# Altium PCB touch-tara-h-6 (final).PcbDoc
Units mm, origin at the board's own origin, x right, y up, seen from the top; angles counter-clockwise.
Board outline 39.75 x 59.82 mm, 2 copper layers (Top Layer, Bottom Layer); 26 components, 28 nets, 73 pads, 0 vias.
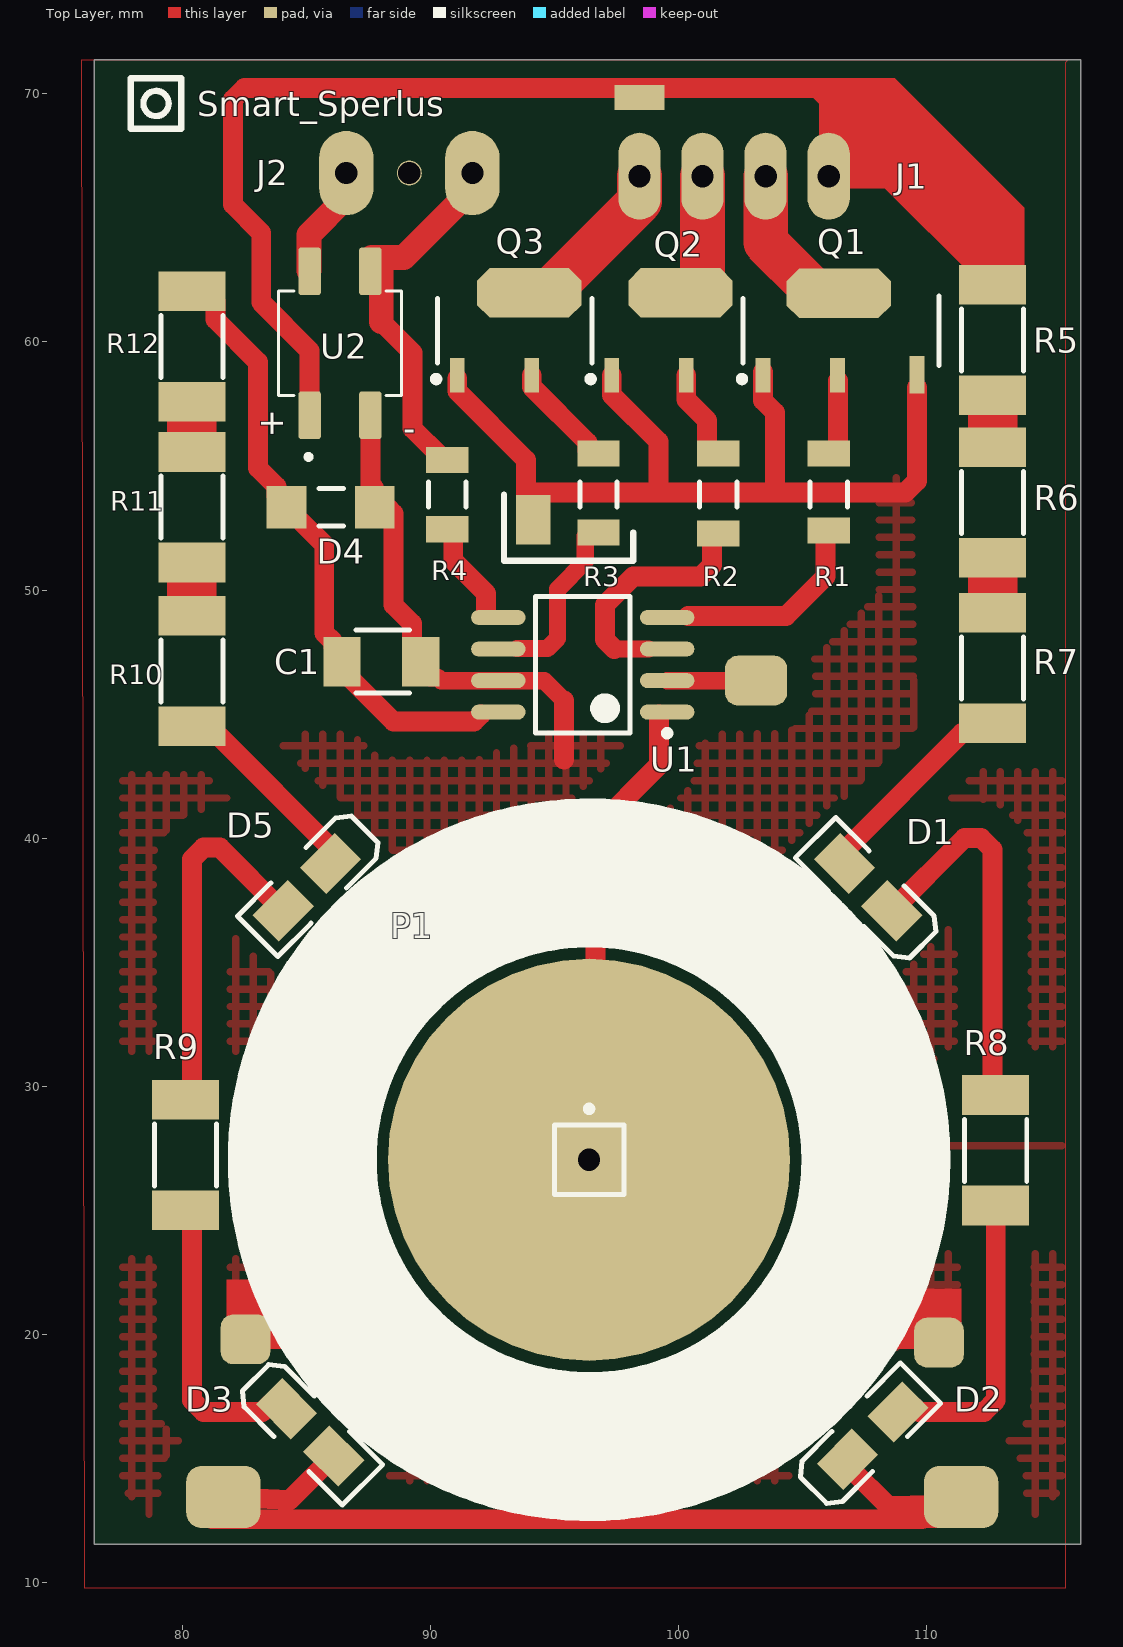
[diagram p0: Top Layer view]
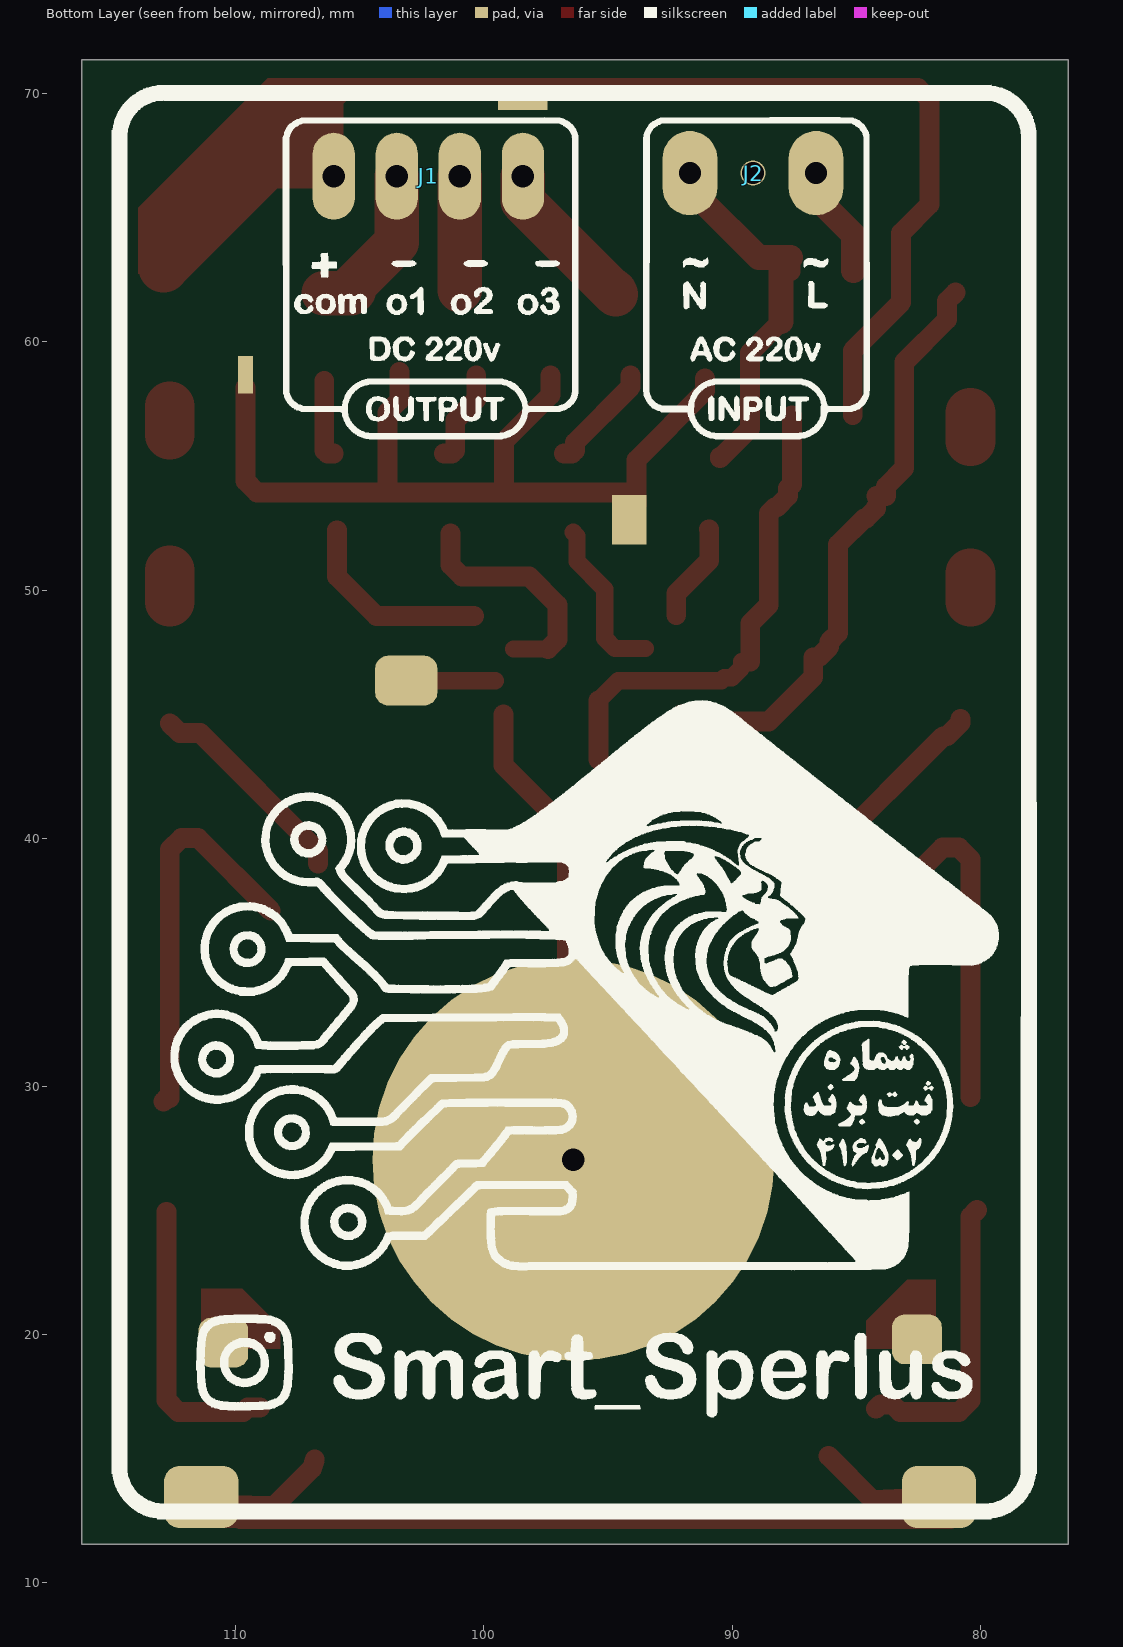
[diagram p1: Bottom Layer view, seen from below]
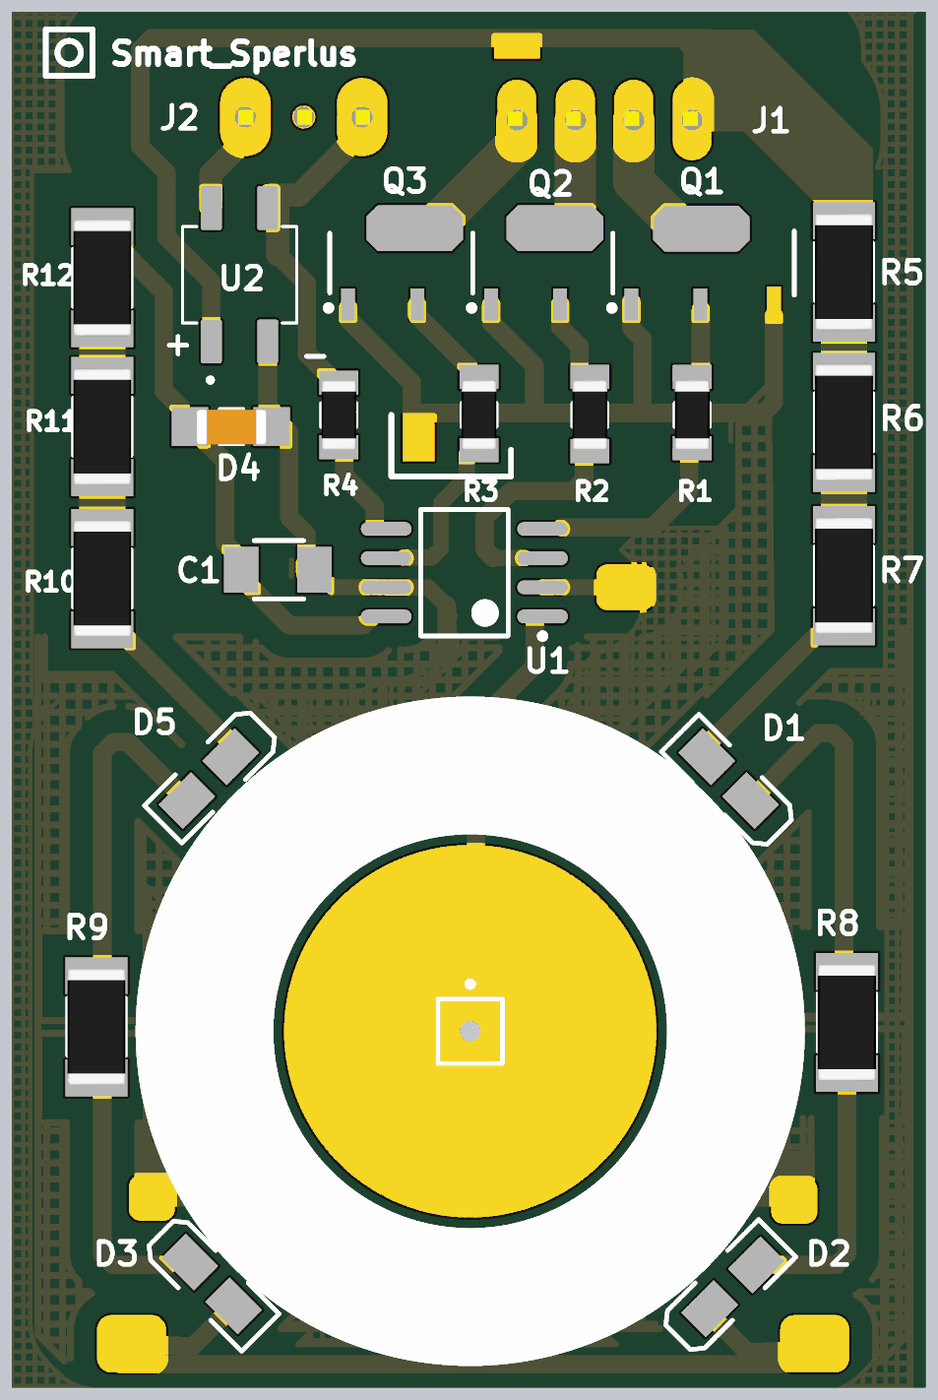
[diagram p2: 3D render of the assembled board from above, using the file's embedded part models]

## Layer stack, top to bottom
Top Solder: solder mask 0.0102, Solder Resist, Dk 3.5
Top Layer: signal copper 0.0356
Dielectric 1: dielectric 0.32, FR-4, Dk 4.8
Bottom Layer: signal copper 0.0356
Bottom Solder: solder mask 0.0102, Solder Resist, Dk 3.5

## Board outline
76.454,11.557 76.454,71.374 116.205,71.374 116.205,11.557

## Design rules (kind name [scope] priority, off if disabled: settings)
Clearance Clearance_1 [InPolygon] p1: gap=1 ignorepadtopadclearanceinfootprint=FALSE
Clearance [All] p2: gap=0.6 ignorepadtopadclearanceinfootprint=FALSE
PolygonConnect [All] p1: connectstyle=Relief reliefconductorwidth=0.254 reliefentries=4 polygonreliefangle="90 Angle" airgapwidth=0.254
RoomDefinition touch-tara-h [InComponentClass('touch-tara-h')] p1: confinementstyle=ConfineIn formatcopy=TRUE lockcomponents=FALSE outline 144.907,-4.953 247.904,-4.953 247.904,23.114 144.907,23.114
RoutingLayers [All] p1: top layer_v5=FALSE bottom layer_v5=TRUE
RoutingVias [All] p1: holewidth=0.711 width=2.5 viastyle="Through Hole" minholewidth=0.711 minwidth=1.27 maxholewidth=0.711 maxwidth=2
SolderMaskExpansion [All] p1: expansion=0.102 istentingtop=FALSE
Width [All] p1: maxlimit=3 minlimit=0.5 preferedwidth=1
29 further rules are at their usual default settings.

## Components (designator, comment, footprint, x,y, rotation, side; value= is the part's Value field where it differs from the comment)
C1 "=Value" "CAP 1206" 85.979,53.34 r0 top
D1 "LED2" 3.2X1.6X1.1#1 107.569,37.973 r315 top
D2 "LED2" 3.2X1.6X1.1#2 107.696,16.002 r225 top
D3 "LED2" 3.2X1.6X1.1#3 85.217,16.002 r135 top
D4 "Diode" C1206 88.265,47.117 r180 top
D5 "LED2" 3.2X1.6X1.1#4 85.09,38.1 r45 top
J1 "Header4X1" "HEADER 4X1" 106.045,66.675 r180 bottom
J2 "Header3X1" "HEADER 3X1" 86.614,66.802 r0 bottom
P1 "Plug" PIN1 96.393,27.051 r0 top
Q1 "Triac" SOT89N#1 104.902,60.452 r90 top
Q2 "Triac" SOT89N#2 98.806,60.452 r90 top
Q3 "Triac" SOT89N#3 92.583,60.452 r90 top
R1 "10K" "RES 1206 (3216X08L)"#1 106.045,53.848 r90 top (schematic designator R2)
R2 "10K" "RES 1206 (3216X08L)"#2 101.6,53.848 r90 top (schematic designator R3)
R3 "10K" "RES 1206 (3216X08L)"#3 96.774,53.848 r90 top (schematic designator R10)
R4 "10K" "RES 1206 (3216X08L)"#4 90.678,53.848 r270 top (schematic designator R13)
R5 "10K" "RES 2010 (5026X08L)" 112.649,60.071 r270 top (schematic designator R4)
R6 "10K" "RES 2010 (5026X08L)" 112.649,53.528 r270 top (schematic designator R5)
R7 "10K" "RES 2010 (5026X08L)" 112.649,46.863 r270 top (schematic designator R6)
R8 "10K" "RES 2010 (5026X08L)" 112.776,27.432 r270 top (schematic designator R12)
R9 "10K" "RES 2010 (5026X08L)" 80.137,27.244 r90 top (schematic designator R11)
R10 "10K" "RES 2010 (5026X08L)" 80.391,46.736 r90 top (schematic designator R7)
R11 "10K" "RES 2010 (5026X08L)" 80.391,53.34 r90 top (schematic designator R8)
R12 "10K" "RES 2010 (5026X08L)" 80.391,59.817 r90 top (schematic designator R9)
U1 "ATtiny15L-1SC" 8S2_N 96.139,46.99 r180 top
U2 "MB6S" SOIC245P670X270-4N 86.36,59.944 r90 top

## Footprints (in the part's own frame and the unit in brackets; to place one, negate y for a bottom-side part, rotate by r counter-clockwise, add the part's x,y. Pads: shape width x height; smd on the part's side, far side on the other; paste and mask are expansions set on the pad)
3.2X1.6X1.1#1 [mm] "SMT LED; 2 Flat Leads"
  rect 2x1.5 smd: 1(-1.347,0.09) 2(1.347,0.09)
  silkscreen extent -2.9,-1.15 3.2,1.15
3.2X1.6X1.1#2 [mm] "SMT LED; 2 Flat Leads"
  rect 2x1.5 smd: 1(-1.437,0.18) 2(1.347,0.09)
  silkscreen extent -2.9,-1.15 3.2,1.15
3.2X1.6X1.1#3 [mm] "SMT LED; 2 Flat Leads"
  rect 2x1.5 smd: 1(-1.257,0) 2(1.437,0)
  silkscreen extent -2.9,-1.15 3.2,1.15
3.2X1.6X1.1#4 [mm] "SMT LED; 2 Flat Leads"
  rect 2x1.5 smd: 1(-1.437,0) 2(1.257,0)
  silkscreen extent -2.9,-1.15 3.2,1.15
8S2_N [mm] "SOP, 8-Leads, Body 5.3x5.3mm, Pitch 1.27mm, IPC Medium Density"
  oval 2.2x0.6 smd: 1(-3.4,1.905) 2(-3.4,0.635) 3(-3.4,-0.635) 4(-3.4,-1.905) 5(3.4,-1.905) 6(3.4,-0.635) 7(3.4,0.635) 8(3.4,1.905)
  silkscreen extent -3.52,-2.75 1.9,2.88, body extent -2.73,-2.75 2.73,2.75, height 2.16
C1206 [mm] "Chip Capacitor, Body 3.2x1.6mm, IPC High Density"
  rect 1.5x2 smd: 1(-1.35,0) 2(1.83,0)
  silkscreen extent -0.89,-1.27 1.27,1.27, body extent -1.7,-0.9 1.7,0.9, height 1.3
"CAP 1206" [mm]
  rect 1.6x1.7 smd: 1(-1.778,0) 2(1.778,0)
  silkscreen extent -0.47,-0.75 0.53,0.75, body extent -1.49,-0.77 1.55,0.75, height 0.75
"HEADER 3X1" [mm]
  oval 2.2x3.4 hole 0.9: 1(0,0) 3(5.08,0)
  round 1 hole 0.9: 2(2.54,0)
  body extent -1.24,-1.27 6.38,1.27, height 8.38
"HEADER 4X1" [mm]
  oval 1.7x3.5 hole 0.9: 1(0,0) 2(2.54,0) 3(5.08,0) 4(7.62,0)
  body extent -1.19,-1.22 8.97,1.32, height 8.38
PIN1 [mm] "Connector; Plug"
  round 16.2 hole 0.9: 1(0,0)
  silkscreen extent -1.4,-1.4 1.4,2.17
"RES 1206 (3216X08L)"#1 [mm] "Chip Resistor, 2-Leads, Body 3.2x1.6mm, IPC High Density _ (0.125 W)"
  rect 1.05x1.7 smd: 1(-1.44,0) 2(1.651,0)
  silkscreen extent -0.5,-0.75 0.5,0.75, body extent -1.52,-0.76 1.53,0.76, height 0.6
"RES 1206 (3216X08L)"#2 [mm] "Chip Resistor, 2-Leads, Body 3.2x1.6mm, IPC High Density _ (0.125 W)"
  rect 1.05x1.7 smd: 1(-1.567,0) 2(1.651,0)
  silkscreen extent -0.5,-0.75 0.5,0.75, body extent -1.52,-0.76 1.53,0.76, height 0.6
"RES 1206 (3216X08L)"#3 [mm] "Chip Resistor, 2-Leads, Body 3.2x1.6mm, IPC High Density _ (0.125 W)"
  rect 1.05x1.7 smd: 1(-1.524,0) 2(1.651,0)
  silkscreen extent -0.5,-0.75 0.5,0.75, body extent -1.52,-0.76 1.53,0.76, height 0.6
"RES 1206 (3216X08L)"#4 [mm] "Chip Resistor, 2-Leads, Body 3.2x1.6mm, IPC High Density _ (0.125 W)"
  rect 1.05x1.7 smd: 1(-1.397,0) 2(1.397,0)
  silkscreen extent -0.5,-0.75 0.5,0.75, body extent -1.52,-0.76 1.53,0.76, height 0.6
"RES 2010 (5026X08L)" [mm] "Chip Resistor, 2-Leads, Body 5.0x2.6mm, IPC High Density _ (0.250 W)"
  rect 1.6x2.7 smd: 1(-2.225,0) 2(2.225,0)
  silkscreen extent -1.25,-1.25 1.25,1.25, body extent -2.54,-1.27 2.54,1.27, height 0.6
SOIC245P670X270-4N [mm]
  rrect23% 1.91x0.91 smd: 1(-2.9,1.225) 2(-2.9,-1.225) 3(2.9,-1.225) 4(2.9,1.225)
  silkscreen extent -4.68,-2.48 2.1,2.48
SOT89N#1 [mm] "SOT89, 3-Leads, Body 4.5x2.4 mm, Pitch 1.5mm, Lead Span 4.1mm, IPC Medium Density"
  rect 1.4x0.6 smd: 1(-1.8,1.5) 3(-1.8,-1.5)
  oct 2x4.2 smd: 2(1.502,-1.548)
  silkscreen extent -2.07,-5.59 1.4,2.47, body extent -1.3,-2.3 1.3,2.3, height 1.6
SOT89N#2 [mm] "SOT89, 3-Leads, Body 4.5x2.4 mm, Pitch 1.5mm, Lead Span 4.1mm, IPC Medium Density"
  rect 1.4x0.6 smd: 1(-1.8,1.5) 3(-1.8,-1.5)
  oct 2x4.2 smd: 2(1.524,-1.27)
  silkscreen extent -2.07,2.22 1.3,2.47, body extent -1.3,-2.3 1.3,2.3, height 1.6
SOT89N#3 [mm] "SOT89, 3-Leads, Body 4.5x2.4 mm, Pitch 1.5mm, Lead Span 4.1mm, IPC Medium Density"
  rect 1.4x0.6 smd: 1(-1.8,1.5) 3(-1.8,-1.5)
  oct 2x4.2 smd: 2(1.524,-1.397)
  silkscreen extent -2.07,2.22 1.3,2.47, body extent -1.3,-2.3 1.3,2.3, height 1.6

## Part data
C1: library part Capacitor, "Capacitor"
D1 D2 D3 D5: "Typical RED, GREEN, YELLOW, AMBER GaAs LED", LatestRevisionDate=17-Jul-2002, LatestRevisionNote="Re-released for DXP Platform.", PackageDescription="SM LED; 2 Flat Leads", PackageReference=3.2X1.6X1.1, PackageVersion=Feb-2002, Published=8-Jun-2000, Publisher="Altium Limited"
D4: "Default Diode", Code_JEDEC=DO-214-AB, LatestRevisionDate=17-Jul-2002, LatestRevisionNote="Re-released for DXP Platform.", PackageDescription="DO-214-AB/SMC; 2 C-Bend Leads; Body 7.9 x 5.9 mm, inc. leads (LxW)", PackageReference=SMC, PackageVersion=Sep-1996, Published=8-Jun-2000, Publisher="Altium Limited"
Q1 Q2 Q3: "Silicon Bidirectional Triode Thyristor", ComponentLink1Description="Manufacturer Link", ComponentLink1URL=http://www.motorola.com/, DatasheetVersion=1999, LatestRevisionDate=17-Jul-2002, LatestRevisionNote="Re-released for DXP Platform.", Note="Pin 2 is electrically connected to Pin 4 (TAB)", PackageDescription="TO, Thru-Hole, Vertical, Heatsink Mounted; 3 In-Line Leads; Pitch 2.28 mm", PackageReference=369-03, Published=29-Sep-2000, Publisher="Altium Limited"
R1 R2 R3 R4 R5 R6 R7 R8 R9 R10 R11 R12: library part Resistor, "Resistor", Power="1/4 W", Tolerance=5%
U1: "8-Bit AVR Microcontroller with 1K Byte of Flash Memory", Supplier Part Number 1=ATTINY15L-1SC-ND, ComponentLink1Description=Datasheet, ComponentLink1URL=http://www.atmel.com/dyn/resources/prod_documents/doc1187.pdf, ComponentLink2Description="Atmel.com Home", ComponentLink2URL=http://www.atmel.com, DatasheetVersion=1187E-AVR-06/02, LatestRevisionDate=16-Oct-2006, LatestRevisionNote="IPC-7351 Footprint Added.", PackageDescription="8-Lead, 0.208\" Body, Plastic Small Outline Package (EIAJ)", PackageReference=8S2, PackageVersion="revF, Apr-2008", Published=17-Sep-2003, Publisher="Altium Limited", Supplier 1=Digi-Key, Supplier 2=Mouser, Supplier Part Number 2=556-ATTINY15L1SC
U2: "Bridge Rectifier Single Phase Standard 600V Surface Mount 4-SOIC", Package="BESOP-4 Surge Components", Digi-Key_Part_Number=MB6SCT-ND, Digi-Key_Purchase_URL=https://www.digikey.com.tr/product-detail/en/on-semiconductor/MB6S/MB6SCT-ND/965654?utm_source=snapeda&utm_medium=aggregator&utm_campaign=symbol, MF="ON Semiconductor", MP=MB6S, SnapEDA_Link=https://www.snapeda.com/parts/MB6S/ON%20Semiconductor/view-part/2774209/?ref=snap
P1: LatestRevisionDate=17-Jul-2002, LatestRevisionNote="Re-released for DXP Platform.", Publisher="Altium Limited"

## Free pads (board coordinates)
  rect 1.4x2 all layers, no hole: 156(94.14,52.832)
  rrect50% 2.5x2 all layers, no hole: 157(103.124,46.355)
  rrect50% 3x2.5 all layers, no hole: 158(81.661,13.462) 159(111.379,13.462)
  rect 2x1 all layers, no hole: 160(98.425,69.85)
  rrect50% 2x2 all layers, no hole: 161(110.49,19.685) 162(82.55,19.812)
  rect 0.6x1.524 all layers, no hole: 163(109.601,58.674)

## Nets (pads, with @x,y where several pads share a name; then routed paths per layer and width w, separated by ;. In a path a pad name is that pad's centre, name@x,y a point inside that pad or via, vN(x,y) a via of type N, cw(c..) or ccw(c..) an arc to the next point about the centre after c; other vN are vias at no path point)
GND: C1.2 D4.1 pad.156 pad.161 pad.162 pad.163 Q1.1 Q2.1 Q3.1 U1.7 U2.2 | length 56.8
  Top Layer w0.7: D4.1 89.615,46.867 90.015,46.467 90.313,46.467 90.425,46.355 U1.7 92.749,46.345 94.588,46.345 95.377,45.556
  Top Layer w0.8: U2.2 87.585,54.259 87.738,54.106 87.738,53.79 88.188,53.34 88.265,53.34 88.519,53.086 88.519,49.403 89.265,48.657 D4.1@89.265,47.117 ; Q3.1@91.083,58.525 91.083,58.015 93.853,55.245 93.853,53.933 ; pad.156@94.234,52.832 94.207,52.875 93.853,53.432 93.853,53.933 ; 95.377,43.18 95.377,45.556 ; Q2.1 97.306,57.865 99.187,55.984 99.187,53.933 ; Q1.1@103.402,58.779 103.402,57.634 103.886,57.15 103.886,53.933 ; pad.163@109.601,58.164 109.601,54.402 109.132,53.933 103.886,53.933 ; 93.853,53.933 99.187,53.933 ; 99.187,53.933 103.886,53.933
NetD1_1: D1.1 R7.2 | length 8.6
  Top Layer w0.8: D1.1 106.673,38.996 106.673,39.49 111.421,44.238 112.249,44.238 R7.2
NetD1_2: D1.2 R8.1 | length 15.7
  Top Layer w0.8: D1.2 111.518,40.017 112.18,40.017 112.649,39.548 R8.1@112.649,29.53 ; R8.1@112.776,29.53 R8.1@112.903,29.403
NetD2_1: D2.1 R8.2 | length 11.6
  Top Layer w0.8: D2.1@109.016,17.068 109.511,17.068 109.688,16.891 112.307,16.891 112.776,17.36 R8.2@112.776,24.953
NetD2_2: D2.2 D3.1 pad.158 pad.159 | length 42.3
  Top Layer w0.8: D3.1 84.335,13.342 pad.158 81.28,12.954 81.28,12.641 81.209,12.57 109.81,12.57 109.865,12.624 110.668,12.624 pad.159 110.504,13.17 108.792,13.096 108.443,13.096 106.927,14.612 D2.2
NetD3_2: D3.2 R9.1 | length 12
  Top Layer w0.8: R9.1 80.391,24.765 80.391,17.36 80.86,16.891 83.225,16.891 83.529,17.195 84.024,17.195 D3.2
NetD5_1: D5.1 R9.2 | length 14.5
  Top Layer w0.8: R9.2@80.391,29.578 80.391,39.154 80.86,39.623 81.522,39.623 D5.1@84.067,37.077
NetD5_2: D5.2 R10.1 | length 8.1
  Top Layer w0.8: R10.1@80.796,44.807 80.796,44.656 81.341,44.111 81.492,44.111 86.049,39.554 86.049,39.059 D5.2
NetJ1_2: J1.2 Q1.2 | length 6.6
  Top Layer w1.8: J1.2 103.505,64.008 105.25,62.263 105.25,62.054 105.35,61.954 Q1.2
NetJ1_3: J1.3 Q2.2 | length 4.6
  Top Layer w1.8: Q2.2@100.965,62.076 J1.3
NetJ1_4: J1.4 Q3.2 | length 6.4
  Top Layer w1.8: Q3.2@94.678,61.912 98.425,65.659 J1.4 ; Q3.2@94.733,62.01 Q3.2@94.799,62.076
NetJ2_1: J2.1 U2.4 | length 4.6
  Top Layer w0.8: U2.4@85.108,62.871 U2.4 ; J2.1@86.614,65.823 J2.1
  Top Layer w1: U2.4@85.108,62.871 85.108,64.317 J2.1@86.614,65.823
NetJ2_3: J2.3 R4.1 U2.3 | length 15.4
  Top Layer w0.8: U2.3@87.64,62.844 U2.3@87.64,63.399 ; 88.021,60.823 89.281,59.563 89.281,56.515 90.426,55.37 90.482,55.37 R4.1@90.482,55.314 ; J2.3@91.254,65.727 91.254,67.124 J2.3@91.454,67.324
  Top Layer w1: U2.3@87.64,63.399 88.926,63.399 J2.3@91.254,65.727 ; 88.021,60.823 U2.3@88.021,62.844
NetP1_1: P1.1 U1.1 | length 18
  Top Layer w0.8: P1.1@96.647,28.067 96.647,40.386 99.203,42.942 U1.1@99.203,44.985
NetQ1_3: Q1.3 R1.2 | length 3.2
  Top Layer w0.8: R1.2 106.301,55.499 106.426,55.624 Q1.3@106.426,58.436
NetQ2_3: Q2.3 R2.2 | length 3.9
  Top Layer w0.8: Q2.3 100.306,57.682 101.15,56.838 101.15,55.624 101.275,55.499 R2.2
NetQ3_3: Q3.3 R3.2 | length 4.5
  Top Layer w0.8: Q3.3 94.083,58.19 96.324,55.949 96.324,55.624 96.449,55.499 R3.2
NetR4_2: R5.2 R6.1 | length 1.1
  Top Layer w2: R6.1@112.649,56.261 R5.2@112.649,57.404
NetR5_2: R6.2 R7.1 | length 1.3
  Top Layer w2: R7.1@112.649,49.53 R6.2@112.649,50.8
NetR7_2: R10.2 R11.1 | length 1.1
  Top Layer w2: R10.2@80.391,49.53 R11.1@80.391,50.673
NetR8_2: R11.2 R12.1 | length 1.1
  Top Layer w2: R11.2@80.391,56.007 R12.1@80.391,57.15
o1: pad.157 U1.2 | length 3.1
  Top Layer w0.7: U1.2 pad.157@102.616,46.355
o2: R1.1 U1.4 | length 8
  Top Layer w0.8: U1.4@100.391,48.956 104.328,48.956 105.918,50.546 R1.1@105.918,52.408
o3: R2.1 U1.3 | length 9.6
  Top Layer w0.7: 97.409,47.625 U1.3@98.789,47.625
  Top Layer w0.8: 97.409,47.625 97.028,48.006 97.028,49.403 98.171,50.546 100.877,50.546 101.346,51.015 R2.1@101.346,52.281
o4: R3.1 U1.6 | length 6.6
  Top Layer w0.7: U1.6@93.489,47.645 94.713,47.645 95.123,48.055 95.123,50.038 96.244,51.159 96.244,52.175 R3.1@96.393,52.324
o5: R4.2 U1.5 | length 4
  Top Layer w0.8: R4.2@90.932,52.451 90.918,52.437 90.918,51.195 92.247,49.866 U1.5@92.247,48.995
vcc: C1.1 D4.2 R12.2 U1.8 | length 24
  Top Layer w0.8: R12.2@81.001,61.982 81.341,61.642 81.341,60.899 83.058,59.182 83.058,54.914 83.801,54.171 83.801,53.79 C1.1@84.182,53.79 ; C1.1 84.201,53.29 84.601,52.89 84.671,52.89 85.725,51.836 85.725,48.277 86.085,47.917 86.085,47.717 86.525,47.277 86.725,47.277 86.725,46.498 88.519,44.704 91.758,44.704 U1.8@92.039,44.985
VDD: J1.1 pad.160 R5.1 U2.1 | length 50.2
  Top Layer w0.8: U2.1 85.135,59.645 83.185,61.595 83.185,64.389 82.042,65.532 82.042,69.762 82.511,70.231 98.425,70.231 106.807,70.231 109.283,67.754
  Top Layer w2: 106.934,67.183 108.712,67.183 R5.1@112.903,62.992
pads on no net: J2.2

## Polygon pours and split planes (outlines as drawn)
GND on Top Layer "GND_L01_P053" (hatched 90Degree grid 0.7 track 0.3, remove dead copper, pour order 53): 77.597,44.196 77.597,13.843 78.74,12.7 114.3,12.7 115.443,13.843 115.443,44.438 109.488,44.438 109.347,55.753 109.347,55.118 108.077,53.848 108.077,49.784 105.791,47.498 103.632,47.498 103.632,44.704 103.124,44.196 86.233,44.196
GND on Top Layer "NONET_L01_P024" (hatched 90Degree grid 0.5 track 0.2, shelved, pour order 24): 75.946,71.374 115.697,71.374 115.57,71.247 115.57,9.779 76.073,9.779

## Other copper
Top Layer:
  region net GND: 81.788,22.225 81.788,20.193 82.55,19.431 84.582,19.431 84.582,20.574 82.931,22.225
  region net GND: 111.379,21.844 111.379,19.939 110.871,19.431 108.204,19.431 108.204,20.32 109.728,21.844
  region net VDD: 105.334,70.612 108.712,70.612 113.919,65.405 113.919,62.738 111.76,62.738 107.95,66.548 107.95,66.802 105.664,66.802 105.537,66.929 105.664,67.056 105.664,69.596 105.029,70.231

## Silkscreen, mask and mechanical layers (free items; w line width, h text height)
Top Overlay:
  circle w6: c96.393,27.051 r11.557
  circle w0.254: c78.947,69.604 r0.508
  lines w0.254: 92.964,53.848 92.964,51.181 98.171,51.181 98.171,52.324 ; 77.931,68.588 79.963,68.588 79.963,70.62 77.931,70.62 77.931,68.588
  text "Smart_Sperlus" at 80.598,69.096 h1
Bottom Overlay:
  drawing of 87 lines, arcs and shapes, not listed
Bottom Solder:
  lines w0.2: 76.454,11.557 76.454,71.374 116.332,71.374 116.332,11.557 76.454,11.557

## Text inside footprints (layer, text, board x,y; h text height)
U2: Top Overlay "-" at 88.9,56.007 h1; Top Overlay "+" at 84.074,56.134 h1 r90